# Altium PCB EXP_V121.PcbDoc (part 3 of 4)
Units mm, origin at the board's own origin, x right, y up, seen from the top; angles counter-clockwise.
Board outline 86 x 86 mm, 4 copper layers (Top Layer, Mid-Layer 1, Mid-Layer 2, Bottom Layer), stack 1.584 mm thick; 360 components, 295 nets, 1231 pads, 1192 vias.
Unrouted connection lines stored in the file: 255.
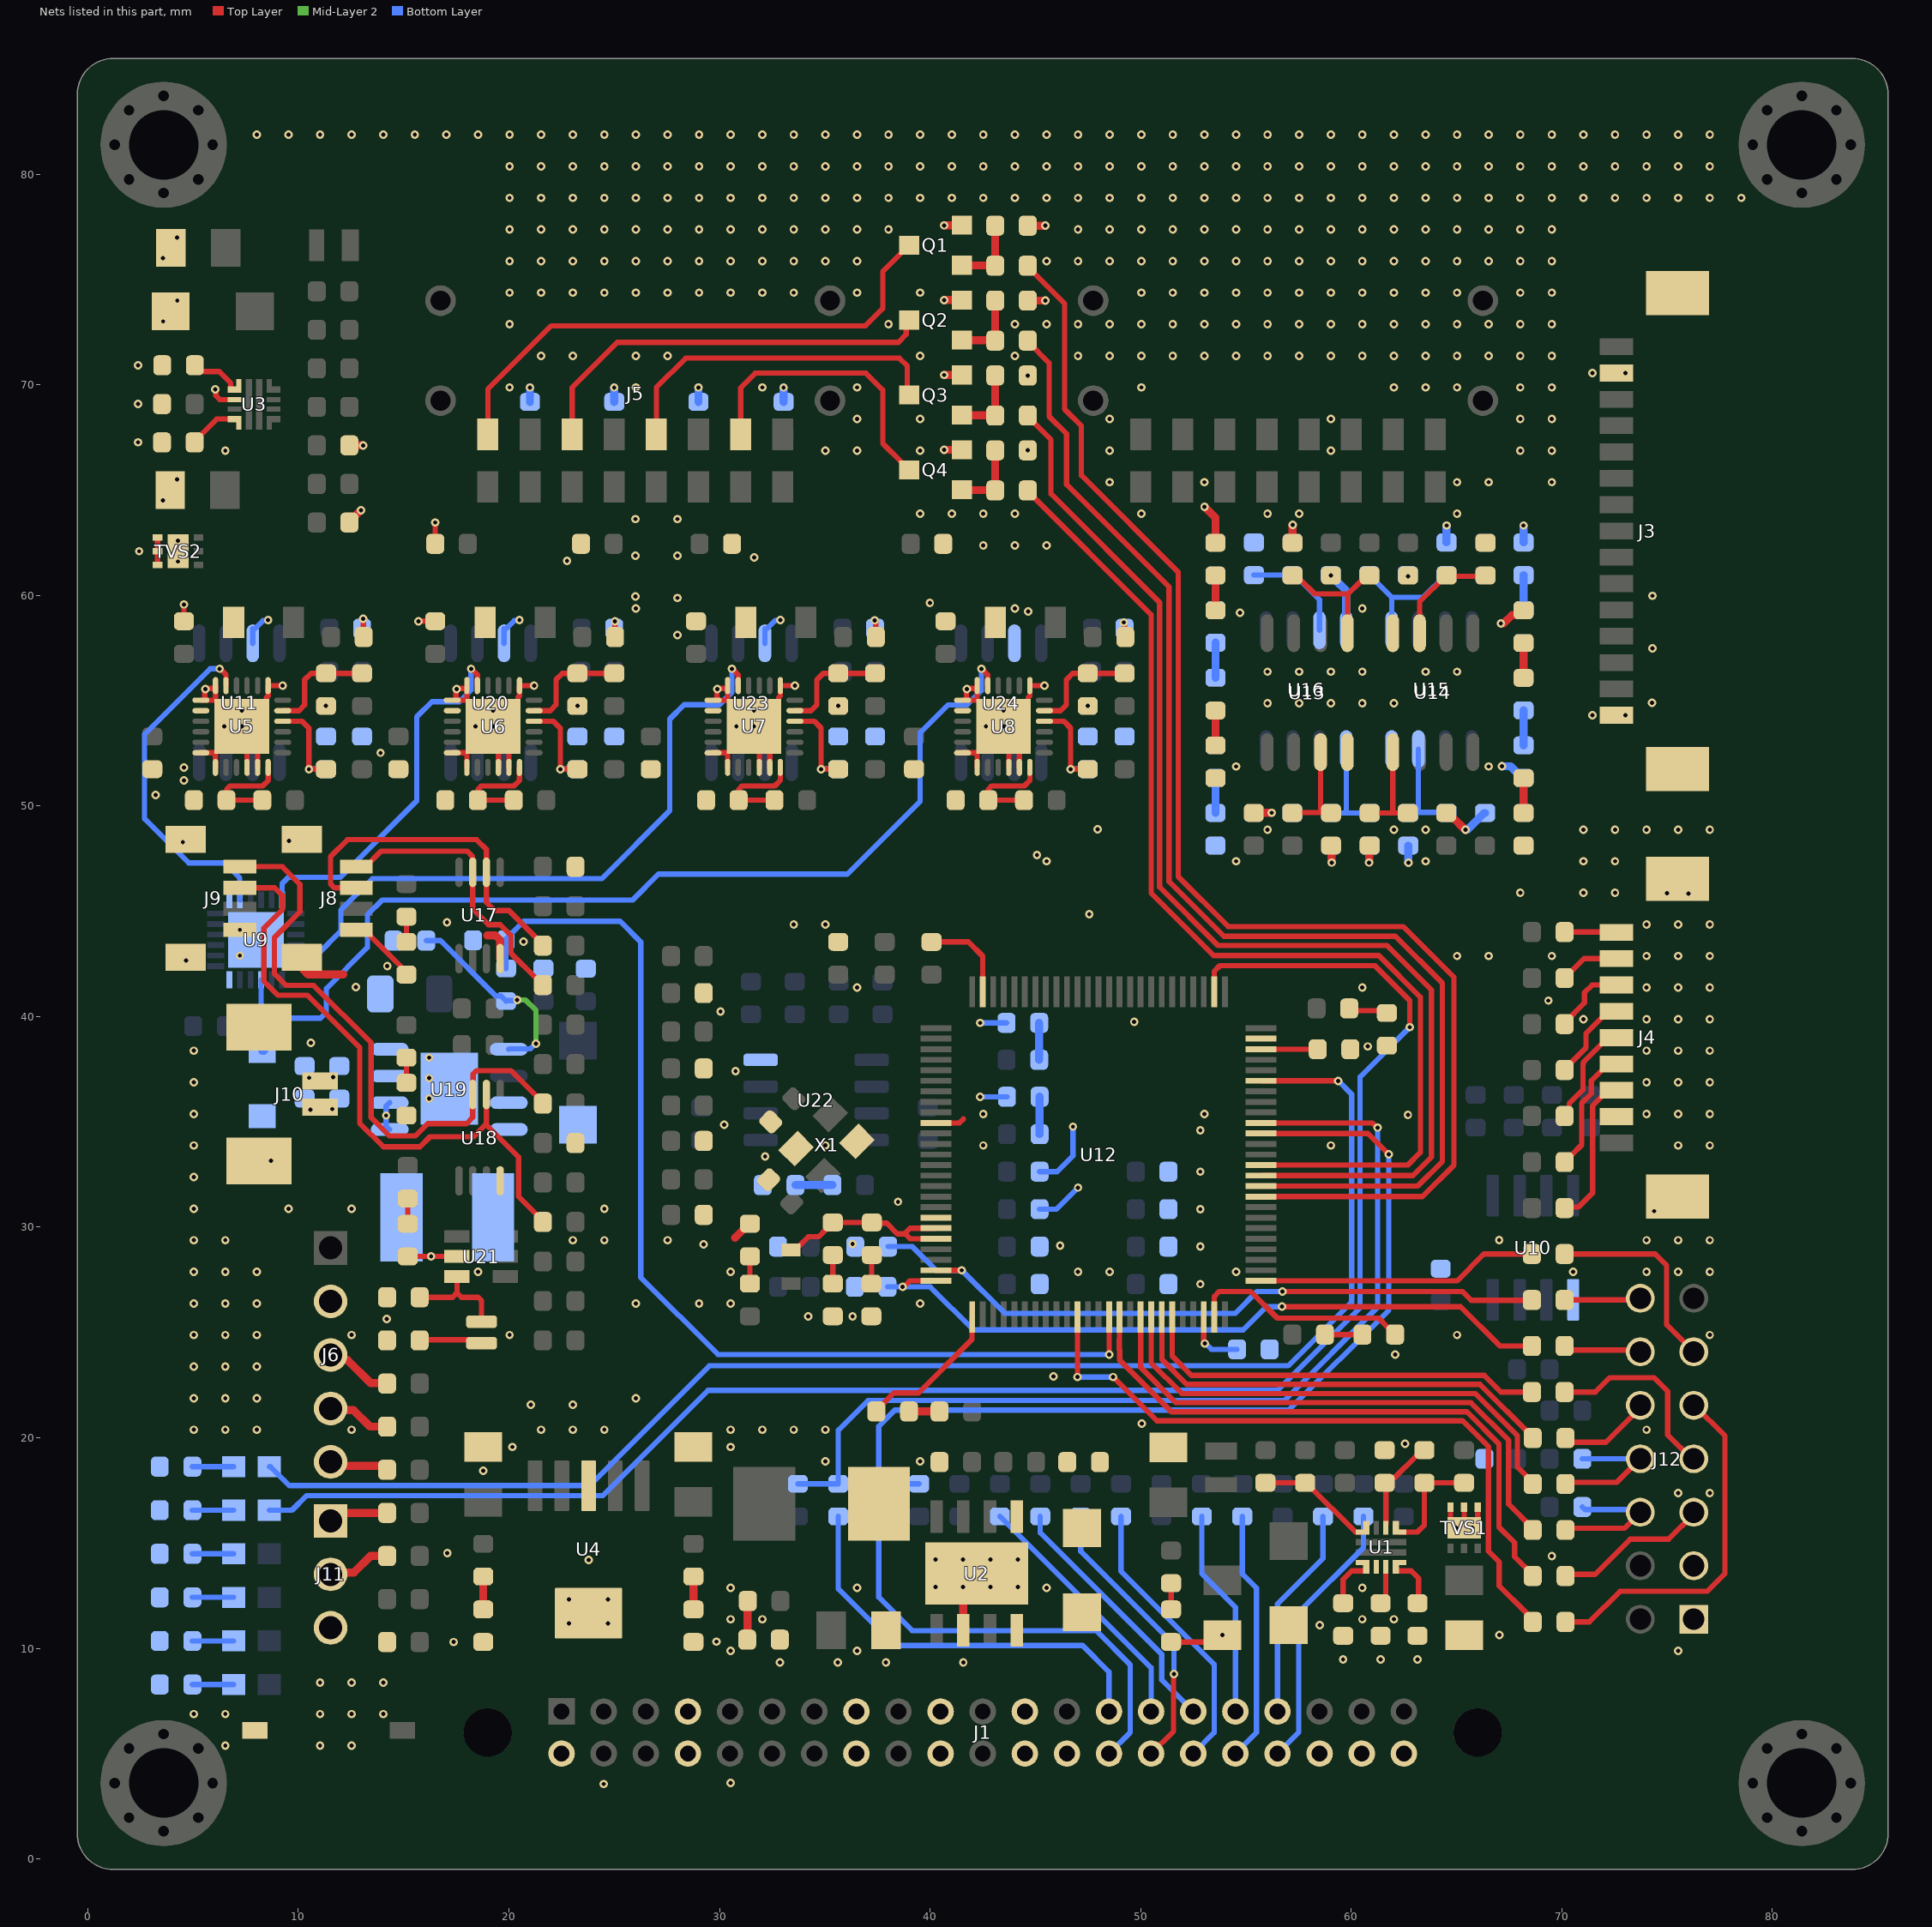
[diagram p5: the nets of this part, all layers, seen from the top]

## Via types
v1: diameter 0.4, hole 0.2, Top Layer to Bottom Layer, tented both sides, 1192 vias

## Nets (pads, with @x,y where several pads share a name; then routed paths per layer and width w, separated by ;. In a path a pad name is that pad's centre, name@x,y a point inside that pad or via, vN(x,y) a via of type N, cw(c..) or ccw(c..) an arc to the next point about the centre after c; other vN are vias at no path point) (continued)
GND: BT1.1 C1.2 C2.2 C3.1 C4.1 C8.2 C9.2 C10.1 C11.1 C12.2 C13.2 C14.1 C15.1 C17.2 C18.2 C20.1 C21.1 C22.1 C23.1 C24.1 C25.1 C26.1 C27.1 C28.1 C29.1 C30.1 C31.1 C32.1 C33.1 C34.1 C35.1 C36.1 C37.1 C38.1 C39.1 C40.1 C41.1 C42.1 C43.1 C44.1 C45.1 C46.1 C47.1 C48.1 C49.1 C50.1 C51.1 C78.1 C79.1 C80.1 C81.1 C82.1 C83.1 C84.1 C87.1 C88.1 C89.1 C90.1 C91.1 C92.1 C95.1 C96.1 C97.1 C98.1 C99.1 C100.1 C103.1 C104.1 C105.1 C106.1 C107.1 C108.1 C111.1 C112.1 C113.1 C114.1 C115.1 C116.1 C119.1 C120.1 C121.1 C122.1 C125.1 C128.1 C129.1 C130.1 C139.1 C144.1 C145.1 C146.1 C148.1 C149.1 C150.2 C151.1 C152.1 C153.1 C154.1 C156.1 D1.2 D2.2 D3.2 J1.34 J1.40 J1.41 J1.42 J3.S1 J3.S2 J4.2 J4.S1 J4.S2 J6.2 J8.1 J8.5 J8.6 J9.1 J9.5 J9.6 J10.S1 J10.S2 J11.3 J12.01 J12.03 Q1.3 Q2.3 Q3.3 Q4.3 R5.2 R6.2 R7.2 R10.2 R11.2 R16.2 R17.2 R18.2 R19.2 R20.2 R27.2 R28.2 R29.2 R30.2 R35.2 R36.2 R46.2 R62.1 R63.1 R64.1 R65.1 R70.2 R71.2 R76.2 R77.2 R82.2 R83.2 R88.2 R89.2 R98.2 R101.2 R104.1 R108.1 R109.1 R111.2 R112.2 R136.2 R137.2 R138.2 R145.2 R151.2 R152.2 R160.2 TVS1.1 TVS1.2 TVS1.3 TVS1.7 TVS2.1 TVS2.2 TVS2.3 TVS2.7 U1.8 U2.6 U2.9 U3.8 U4.3 U4.6 U5.7 U5.12 U5.13 U5.18 U5.19 U5.22 U5.23 U5.25 U6.7 U6.12 U6.13 U6.18 U6.19 U6.22 U6.23 U6.25 U7.7 U7.12 U7.13 U7.18 U7.19 U7.22 U7.23 U7.25 U8.7 U8.12 U8.13 U8.18 U8.19 U8.22 U8.23 U8.25 U9.1 U9.18 U9.HTAB U10.5 U11.7 U12.10 U12.19 U12.26 U12.49 U12.74 U12.99 U13.4 U14.4 U15.4 U16.4 U17.4 U18.4 U19.1 U19.2 U19.EPAD U20.7 U21.2 U22.4 U23.7 U24.7 X1.2 X1.4 | length 150.5
  Top Layer w0.254: TVS2.3@3.313,61.45 TVS2.2@3.313,62.1 TVS2.1@3.313,62.75 ; C24.1@4.562,58.775 v1(4.562,59.572) ; U5.18@5.369,52.525 U5.25@6.062,52.525 ; U5.13@5.369,55.025 U5.13@5.55,55.025 ; v1(6.05,69.78) 6.078,69.752 6.078,69.487 6.264,69.301 U3.8@6.772,69.301 ; U5.19@6.062,51.832 U5.25@6.062,52.525 ; U5.12@6.062,55.718 U5.12@6.062,55.578 ; U5.22@7.562,51.832 7.562,53.102 7.774,53.314 v1(7.312,53.775) ; U5.25@7.824,53.364 8.062,53.125 U5.23@8.062,51.832 ; v1(9.255,55.718) U5.7@8.562,55.718 8.562,55.222 8.485,55.145 8.485,54.948 v1(7.312,53.775) ; J8.1@12.748,44.118 13.193,44.118 13.396,43.915 13.396,43.85 14.836,42.41 14.836,42.288 15.127,41.996 C119.1@15.131,41.996 ; v1(13.072,58.896) 13.086,58.882 13.086,58.048 C26.1@13.081,58.044 ; C148.1@15.194,28.609 U21.2@17.531,28.609 ; v1(15.703,58.775) C25.1@16.5,58.775 ; C32.1@16.5,62.45 v1(16.5,63.463) ; U6.18@17.307,52.525 U6.25@18,52.525 ; U6.13@17.307,55.025 U6.13@17.487,55.025 ; U6.19@18,51.832 U6.25@18,52.525 ; U6.12@18,55.718 U6.12@18,55.578 ; U6.22@19.5,51.832 19.5,53.102 19.711,53.314 v1(19.25,53.775) ; U6.25@19.761,53.364 20,53.125 U6.23@20,51.832 ; v1(21.193,55.718) U6.7@20.5,55.718 20.5,55.222 20.423,55.145 20.423,54.948 v1(19.25,53.775) ; C27.1@25.037,58.025 v1(25.037,58.775) ; U7.18@29.694,52.525 U7.25@30.387,52.525 ; U7.13@29.694,55.025 U7.13@29.874,55.025 ; U7.19@30.387,51.832 U7.25@30.387,52.525 ; U7.12@30.387,55.718 U7.12@30.387,55.578 ; U7.22@31.887,51.832 31.887,53.102 32.098,53.314 v1(31.637,53.775) ; U7.25@32.148,53.364 32.387,53.125 U7.23@32.387,51.832 ; v1(33.58,55.718) U7.7@32.887,55.718 32.887,55.222 32.81,55.145 32.81,54.948 v1(31.637,53.775) ; v1(37.368,58.818) 37.375,58.818 37.419,58.774 37.419,58.03 C38.1@37.424,58.025 ; C146.1@37.449,21.25 37.449,21.3 38.273,22.124 39.448,22.124 41.987,24.663 41.987,25.716 U12.26@42,25.728 ; C128.1@40.07,43.545 41.822,43.545 42.5,42.867 U12.99@42.5,41.172 ; U12.10@40.278,34.95 41.396,34.95 41.587,35.141 ; U8.18@41.544,52.525 U8.25@42.238,52.525 ; U8.13@41.544,55.025 U8.13@41.725,55.025 ; U8.19@42.238,51.832 U8.25@42.238,52.525 ; U8.12@42.238,55.718 U8.12@42.238,55.578 ; U8.22@43.738,51.832 43.738,53.102 43.949,53.314 v1(43.488,53.775) ; U8.25@43.999,53.364 44.238,53.125 U8.23@44.238,51.832 ; v1(45.431,55.718) U8.7@44.738,55.718 44.738,55.222 44.661,55.145 44.661,54.948 v1(43.488,53.775) ; v1(49.2,58.718) 49.228,58.691 49.228,58.072 C39.1@49.275,58.025 ; C10.1@51.445,10.299 53.554,10.299 v1(53.881,10.626) ; U12.49@53.5,25.728 53.5,26.71 53.735,26.945 55.224,26.945 56.489,25.68 61.301,25.68 61.736,25.245 61.74,25.245 62.267,24.718 C144.1@62.267,24.714 ; TVS1.3@64.714,16.699 64.714,16.097 TVS1.7@65.087,15.724 ; TVS1.7@65.364,15.724 TVS1.2@65.364,16.699 ; v1(65.761,15.723) 66.014,15.976 TVS1.1@66.014,16.699 ; U5.13@5.55,55.025 U5.25@6.062,55.025 ; U5.13@5.55,55.025 5.55,55.522 v1(5.578,55.55) 5.606,55.578 U5.12@6.062,55.578 ; U5.25@6.062,52.525 v1(7.312,53.775) ; U5.25@6.062,55.025 U5.12@6.062,55.578 ; U5.25@6.062,55.025 v1(7.312,53.775) ; U6.13@17.487,55.025 17.487,55.522 v1(17.515,55.55) 17.543,55.578 U6.12@18,55.578 ; U6.13@17.487,55.025 U6.25@18,55.025 ; U6.25@18,52.525 v1(19.25,53.775) ; U6.25@18,55.025 v1(19.25,53.775) ; U6.25@18,55.025 U6.12@18,55.578 ; U7.13@29.874,55.025 29.874,55.522 v1(29.902,55.55) 29.93,55.578 U7.12@30.387,55.578 ; U7.13@29.874,55.025 U7.25@30.387,55.025 ; U7.25@30.387,52.525 v1(31.637,53.775) ; U7.25@30.387,55.025 v1(31.637,53.775) ; U7.25@30.387,55.025 U7.12@30.387,55.578 ; U8.13@41.725,55.025 41.725,55.522 v1(41.753,55.55) 41.781,55.578 U8.12@42.238,55.578 ; U8.13@41.725,55.025 U8.25@42.238,55.025 ; U8.25@42.238,52.525 v1(43.488,53.775) ; U8.25@42.238,55.025 v1(43.488,53.775) ; U8.25@42.238,55.025 U8.12@42.238,55.578
  Top Layer w0.381: J8.5@9.748,42.818 J8.5@10.168,42.818 10.231,42.755 10.231,42.227 10.454,42.004 12.125,42.004 ; R17.2@12.423,63.463 12.423,63.501 12.956,64.035 12.968,64.035 v1(12.972,64.038) ; R18.2@12.423,67.124 v1(13.074,67.124) ; 18.973,43.852 19.357,43.852 19.581,43.629 U17.4@19.581,42.752 ; 30.745,29.5 31.407,30.162 C80.1@31.445,30.162 ; v1(40.665,77.572) 40.669,77.575 41.502,77.575 Q1.3@41.508,77.582 ; v1(40.672,66.91) 40.676,66.914 Q4.3@41.508,66.914 Q4.3@41.515,66.92 ; v1(40.672,70.466) 40.676,70.47 Q3.3@41.508,70.47 Q3.3@41.515,70.476 ; v1(40.672,74.022) 40.676,74.026 Q2.3@41.508,74.026 Q2.3@41.515,74.032 ; U2.9@41.562,12.908 41.577,12.893 U2.6@41.577,10.858 ; R63.1@44.636,73.994 R63.1@44.642,74 45.475,74 v1(45.479,74.004) ; R62.1@44.636,77.55 R62.1@44.642,77.556 45.475,77.556 v1(45.479,77.56) ; D2.2@47.216,15.71 47.216,15.202 D2.2@47.247,15.171 ; v1(53.035,64.211) 53.035,64.206 53.554,63.687 C87.1@53.554,62.497 ; R71.2@55.371,49.67 55.374,49.673 56.224,49.673 v1(56.227,49.676) ; C90.1@57.219,62.497 v1(57.219,63.351) ; C89.1@59.041,48.12 59.068,48.093 59.068,47.317 v1(59.072,47.313) ; v1(60.852,47.313) 60.856,47.317 60.856,48.106 C97.1@60.87,48.12 ; v1(62.702,60.91) R76.2@62.702,60.947 ; R77.2@64.516,49.67 64.736,49.449 64.832,49.449 65.408,48.873 v1@65.422,48.873 ; v1(67.109,58.671) 67.113,58.674 67.244,58.674 67.639,59.069 67.965,59.069 C95.1@68.186,59.29 ; C96.1@68.134,48.12 C96.1@68.186,48.12 ; v1(74.394,30.762) 74.47,30.762 75.158,31.45 J4.S1@75.5,31.45 ; J4.S2@75.5,46.55 76.013,46.037 v1(76.013,45.845)
  Bottom Layer w0.254: U11.7@7.832,57.725 7.832,58.419 7.926,58.419 8.316,58.809 8.534,58.809 v1(8.562,58.837) ; U19.1@14.341,34.638 14.325,34.638 14.165,34.797 v1(14.165,35.3) 14.165,35.748 14.325,35.908 U19.2@14.341,35.908 ; U20.7@19.77,57.725 19.77,58.419 19.864,58.419 20.254,58.809 20.472,58.809 v1(20.5,58.837) ; U23.7@32.157,57.725 32.157,58.419 32.251,58.419 32.641,58.809 32.859,58.809 v1(32.887,58.837) ; v1(42.372,36.192) C130.1@43.652,36.192 ; v1(42.372,39.7) C145.1@43.632,39.7 ; C98.1@45.202,30.855 46.006,30.855 v1(47.029,31.878) ; C92.1@45.202,32.634 46.029,32.634 46.785,33.39 v1(46.785,34.771)
  Bottom Layer w0.381: v1(20.997,69.875) 20.999,69.874 C83.1@21,69.191 C83.1@21,69.191 ; v1(24.997,69.875) v1(24.997,69.875) 24.999,69.192 C84.1@25,69.191 ; v1(28.997,69.875) v1(28.997,69.875) 28.999,69.192 C139.1@29,69.191 ; v1(33.043,69.875) 33.044,69.874 C122.1@33.045,69.191 C122.1@33.045,69.191 ; v1(59.038,60.947) 59.086,60.947 59.3,60.734 59.3,60.685 59.764,60.221 U16.4@59.764,58.353 ; v1(62.715,47.305) C107.1@62.715,48.12 ; C105.1@64.528,62.517 v1(64.528,63.32) ; v1(65.43,48.87) 65.434,48.873 65.52,48.873 66.316,49.67 R83.2@66.366,49.67 ; v1(67.158,51.892) 67.161,51.889 67.567,51.889 68.124,51.332 C104.1@68.186,51.332 ; C103.1@68.186,62.517 v1(68.186,63.32)
  other v1: 6.529,5.378 11.029,5.378 12.529,5.378 5.029,6.878 6.529,6.878 11.029,6.878 12.529,6.878 14.029,6.878 11.029,8.378 12.529,8.378 14.029,8.378 32.864,9.326 35.62,9.326 37.906,9.326 41.577,9.326 59.617,9.474 61.395,9.474 63.149,9.474 30.529,9.878 36.529,9.878 75.529,9.878 17.376,10.299 29.854,10.318 67.032,10.626 58.5,11.096 22.858,11.176 24.707,11.176 30.529,11.378 32.029,11.378 60.529,11.378 62.029,11.378 22.858,12.319 24.707,12.319 30.529,12.878 36.529,12.878 45.529,12.878 60.529,12.878 23.783,14.193 69.529,14.378 17.075,14.521 64.973,15.723 75.529,17.378 77.029,17.378 18.779,18.428 35.029,18.878 39.529,18.878 20.159,19.56 30.529,19.56 62.56,19.714 5.029,20.378 6.529,20.378 8.029,20.378 12.529,20.378 21.529,20.378 23.029,20.378 24.529,20.378 30.529,20.378 32.029,20.378 33.529,20.378 35.029,20.378 74.029,20.378 50.051,20.672 21.036,21.565 23.036,21.565 5.029,21.878 6.529,21.878 8.029,21.878 26.029,21.878 45.854,22.908 5.029,23.378 6.529,23.378 8.029,23.378 62.084,23.952 5.029,24.878 6.529,24.878 8.029,24.878 12.529,24.878 20.029,24.878 65.029,24.878 77.029,24.878 14.202,25.645 34.219,25.767 36.322,25.767 5.029,26.378 6.529,26.378 8.029,26.378 26.029,26.378 29.029,26.378 30.529,26.378 39.529,26.378 52.835,27.297 5.029,27.878 6.529,27.878 8.029,27.878 18.529,27.878 30.529,27.878 47.029,27.878 48.529,27.878 54.529,27.878 70.54,27.878 74.029,27.878 75.529,27.878 77.029,27.878 16.305,28.609 52.835,29.08 46.177,29.126 29.25,29.187 36.322,29.205 5.029,29.378 6.529,29.378 23.029,29.378 24.529,29.378 27.529,29.378 67.029,29.385 74.029,29.378 75.529,29.378 77.029,29.378 52.835,30.855 5.029,30.878 9.529,30.878 12.529,30.878 24.529,30.878 38.478,31.207 5.029,32.378 52.835,32.634 8.691,33.147 32.167,33.362 5.029,33.878 35.029,33.878 42.529,33.878 59.029,33.878 75.529,33.878 77.029,33.878 52.835,34.598 30.226,34.858 62.693,35.329 5.029,35.378 42.529,35.378 53.029,35.378 74.029,35.378 75.529,35.378 77.029,35.378 16.205,36.101 5.029,36.878 74.029,36.878 75.529,36.878 77.029,36.878 16.205,37.075 30.759,37.414 16.205,38.049 5.029,38.378 74.029,38.378 75.529,38.378 77.029,38.378 60.782,38.583 10.588,38.756 49.695,39.744 71.029,39.878 74.029,39.878 75.529,39.878 77.029,39.878 30.048,40.234 69.366,40.759 12.724,41.395 36.529,41.378 60.529,41.378 74.029,41.378 75.529,41.378 77.029,41.378 14.224,42.395 4.664,42.662 7.221,42.895 65.029,42.878 66.529,42.878 69.529,42.878 74.029,42.878 75.529,42.878 77.029,42.878 20.691,43.553 7.221,44.118 33.529,44.378 35.029,44.378 74.029,44.378 75.529,44.378 77.029,44.378 17.056,44.475 47.561,44.858 74.992,45.866 68.029,45.878 71.029,45.878 72.529,45.878 45.529,47.378 54.529,47.378 63.529,47.378 71.029,47.378 72.529,47.378 45.075,47.668 4.514,48.291 9.55,48.336 56.029,48.878 62.029,48.878 63.529,48.878 71.029,48.878 72.529,48.878 74.029,48.878 75.529,48.878 77.029,48.878 47.957,48.9 3.226,50.521 4.562,51.212 4.562,51.832 54.529,51.878 66.529,51.878 13.9,52.525 6.477,53.775 18.415,53.775 30.801,53.775 42.652,53.775 7.312,54.534 19.25,54.534 31.637,54.534 43.488,54.534 11.312,54.75 23.25,54.75 35.637,54.75 47.488,54.75 56.029,54.878 57.529,54.878 59.029,54.878 60.529,54.878 62.029,54.878 56.029,56.378 57.529,56.378 59.029,56.378 60.529,56.378 63.529,56.378 65.029,56.378 28.001,58.114 54.712,59.182 44.661,59.235 26.029,59.378 44.029,59.378 60.529,59.378 39.989,59.644 28.001,59.878 26.001,59.95 4.283,61.608 22.758,61.646 31.648,61.798 26.001,61.882 28.001,61.882 2.438,62.1 42.529,62.378 44.029,62.378 45.529,62.378 4.283,62.599 26.001,63.625 28.001,63.625 39.529,63.878 41.029,63.878 42.529,63.878 44.029,63.878 50.029,63.878 56.029,63.878 57.529,63.878 65.029,63.878 3.559,64.512 48.529,65.378 53.029,65.378 65.029,65.378 66.529,65.378 69.529,65.378 4.231,65.503 6.529,66.878 35.029,66.878 36.529,66.878 39.529,66.878 44.642,66.888 48.529,66.878 59.029,66.878 68.029,66.878 69.529,66.878 2.388,67.269 36.529,68.378 39.529,68.378 48.529,68.378 59.029,68.378 68.029,68.378 69.529,68.378 2.388,69.087 20.029,69.878 26.029,69.878 32.029,69.878 36.529,69.878 50.029,69.878 62.029,69.878 63.529,69.878 65.029,69.878 68.029,69.878 69.529,69.878 44.642,70.444 2.388,70.93 21.529,71.378 23.029,71.378 26.029,71.378 27.529,71.378 39.529,71.378 44.029,71.378 47.029,71.378 48.529,71.378 50.029,71.378 51.529,71.378 53.029,71.378 54.529,71.378 56.029,71.378 57.529,71.378 59.029,71.378 60.529,71.378 62.029,71.378 63.529,71.378 65.029,71.378 66.529,71.378 68.029,71.378 69.529,71.378 20.029,72.878 38.029,72.878 44.029,72.878 45.529,72.878 47.029,72.878 48.529,72.878 50.029,72.878 51.529,72.878 53.029,72.878 54.529,72.878 56.029,72.878 57.529,72.878 59.029,72.878 60.529,72.878 62.029,72.878 63.529,72.878 65.029,72.878 66.529,72.878 68.029,72.878 69.529,72.878 3.579,73.013 4.251,74.003 20.029,74.378 21.529,74.378 23.029,74.378 24.529,74.378 26.029,74.378 27.529,74.378 29.029,74.378 30.529,74.378 32.029,74.378 33.529,74.378 36.529,74.378 39.529,74.378 50.029,74.378 51.529,74.378 53.029,74.378 54.529,74.378 56.029,74.378 57.529,74.378 59.029,74.378 60.529,74.378 62.029,74.378 63.529,74.378 65.029,74.378 68.029,74.378 69.529,74.378 20.029,75.878 21.529,75.878 23.029,75.878 24.529,75.878 26.029,75.878 27.529,75.878 29.029,75.878 30.529,75.878 32.029,75.878 33.529,75.878 35.029,75.878 36.529,75.878 45.529,75.878 47.029,75.878 48.529,75.878 50.029,75.878 51.529,75.878 53.029,75.878 54.529,75.878 56.029,75.878 57.529,75.878 59.029,75.878 60.529,75.878 62.029,75.878 63.529,75.878 65.029,75.878 66.529,75.878 68.029,75.878 69.529,75.878 3.572,76.01 4.244,77.001 20.029,77.378 21.529,77.378 23.029,77.378 24.529,77.378 26.029,77.378 27.529,77.378 29.029,77.378 30.529,77.378 32.029,77.378 33.529,77.378 35.029,77.378 36.529,77.378 38.029,77.378 47.029,77.378 48.529,77.378 50.029,77.378 51.529,77.378 53.029,77.378 54.529,77.378 56.029,77.378 57.529,77.378 59.029,77.378 60.529,77.378 62.029,77.378 63.529,77.378 65.029,77.378 66.529,77.378 68.029,77.378 69.529,77.378 20.029,78.878 21.529,78.878 23.029,78.878 24.529,78.878 26.029,78.878 27.529,78.878 29.029,78.878 30.529,78.878 32.029,78.878 33.529,78.878 35.029,78.878 36.529,78.878 38.029,78.878 39.529,78.878 41.029,78.878 42.529,78.878 44.029,78.878 45.529,78.878 47.029,78.878 48.529,78.878 50.029,78.878 51.529,78.878 53.029,78.878 54.529,78.878 56.029,78.878 57.529,78.878 59.029,78.878 60.529,78.878 62.029,78.878 63.529,78.878 65.029,78.878 66.529,78.878 68.029,78.878 69.529,78.878 71.029,78.878 72.529,78.878 74.029,78.878 75.529,78.878 77.029,78.878 78.529,78.878 20.029,80.378 21.529,80.378 23.029,80.378 24.529,80.378 26.029,80.378 27.529,80.378 29.029,80.378 30.529,80.378 32.029,80.378 33.529,80.378 35.029,80.378 36.529,80.378 38.029,80.378 39.529,80.378 41.029,80.378 42.529,80.378 44.029,80.378 45.529,80.378 47.029,80.378 48.529,80.378 50.029,80.378 51.529,80.378 53.029,80.378 54.529,80.378 56.029,80.378 57.529,80.378 59.029,80.378 60.529,80.378 62.029,80.378 63.529,80.378 65.029,80.378 66.529,80.378 68.029,80.378 69.529,80.378 71.029,80.378 72.529,80.378 74.029,80.378 75.529,80.378 77.029,80.378 8.029,81.878 9.529,81.878 11.029,81.878 12.529,81.878 14.029,81.878 15.529,81.878 17.029,81.878 18.529,81.878 20.029,81.878 21.529,81.878 23.029,81.878 24.529,81.878 26.029,81.878 27.529,81.878 29.029,81.878 30.529,81.878 32.029,81.878 33.529,81.878 35.029,81.878 36.529,81.878 38.029,81.878 39.529,81.878 41.029,81.878 42.529,81.878 44.029,81.878 45.529,81.878 47.029,81.878 48.529,81.878 50.029,81.878 51.529,81.878 53.029,81.878 54.529,81.878 56.029,81.878 57.529,81.878 59.029,81.878 60.529,81.878 62.029,81.878 63.529,81.878 65.029,81.878 66.529,81.878 68.029,81.878 69.529,81.878 71.029,81.878 72.529,81.878 74.029,81.878 75.529,81.878 77.029,81.878
GND_CAM: J1.4 J1.8 J1.10 J1.12 J1.22 J1.25 J1.29 J1.31 J1.33 J3.1 J3.14
  other v1: 24.5,3.556 30.522,3.603 71.457,54.309 73.025,54.311 74.282,54.896 74.303,57.482 74.303,59.982 71.457,70.559 73.025,70.561
HEATER_1_B: J5.9 Q1.2 | length 26
  Top Layer w0.254: J5.9@19,67.65 19,69.789 22.012,72.801 36.936,72.801 37.753,73.617 37.753,75.376 38.66,76.284 38.66,76.309 38.983,76.632 Q1.2@39.008,76.632
HEATER_2_B: J5.11 Q2.2 | length 19.9
  Top Layer w0.254: J5.11@23,67.65 23,69.872 25.145,72.017 38.49,72.017 38.866,72.394 38.866,72.934 Q2.2@39.008,73.076
HEATER_3_B: J5.13 Q3.2 | length 16.3
  Top Layer w0.254: J5.13@27,67.65 27,69.871 28.399,71.27 38.546,71.27 38.919,70.897 38.919,69.609 Q3.2@39.008,69.52
HEATER_4_B: J5.15 Q4.2 | length 13.9
  Top Layer w0.254: J5.15@31,67.65 31.002,67.652 31.002,69.861 31.697,70.556 36.947,70.556 37.753,69.751 37.753,67.219 38.66,66.312 38.66,66.287 38.983,65.964 Q4.2@39.008,65.964
HEATER_PWM4_1: R58.1 U12.59 | length 65.7
  Top Layer w0.254: R58.1@44.642,75.656 44.642,75.606 46.387,73.862 46.387,68.849 47.188,68.048 47.188,65.697 51.787,61.099 51.787,46.638 54.15,44.275 62.461,44.275 64.881,41.856 64.881,32.949 63.382,31.45 U12.59@55.722,31.45
HEATER_PWM4_2: R59.1 U12.60 | length 61
  Top Layer w0.254: R59.1@44.642,72.1 44.642,72.05 45.655,71.038 45.655,68.503 46.482,67.676 46.482,65.269 51.351,60.401 51.351,46.414 53.95,43.815 62.099,43.815 64.33,41.584 64.33,33.131 63.149,31.95 U12.60@55.722,31.95
HEATER_PWM4_3: R60.1 U12.61 | length 56.3
  Top Layer w0.254: R60.1@44.642,68.544 44.642,68.494 45.743,67.394 45.743,64.825 50.904,59.665 50.904,46.15 53.679,43.374 61.706,43.374 63.813,41.267 63.813,33.333 62.93,32.45 U12.61@55.722,32.45
HEATER_PWM4_4: R61.1 U12.62 | length 51.6
  Top Layer w0.254: R61.1@44.642,64.988 44.642,64.938 50.5,59.081 50.5,45.868 53.467,42.901 61.315,42.901 63.286,40.93 63.286,33.543 62.693,32.95 U12.62@55.722,32.95
ILIM_1: R23.2 R27.1 U5.4 | length 5
  Top Layer w0.254: U5.4@9.255,54.025 10.175,54.025 10.5,53.7 v1(10.5,51.75) R23.2@11.312,51.75
  Bottom Layer w0.254: v1(10.5,51.75) R27.1@11.312,51.75
ILIM_2: R24.2 R28.1 U6.4 | length 5
  Top Layer w0.254: U6.4@21.193,54.025 22.113,54.025 22.438,53.7 v1(22.438,51.75) R24.2@23.25,51.75
  Bottom Layer w0.254: v1(22.438,51.75) R28.1@23.25,51.75
ILIM_3: R56.2 R136.1 U7.4 | length 5
  Top Layer w0.254: U7.4@33.58,54.025 34.5,54.025 34.825,53.7 v1(34.825,51.75) R56.2@35.637,51.75
  Bottom Layer w0.254: v1(34.825,51.75) R136.1@35.637,51.75
ILIM_4: R57.2 R137.1 U8.4 | length 5
  Top Layer w0.254: U8.4@45.431,54.025 46.35,54.025 46.675,53.7 v1(46.675,51.75) R57.2@47.488,51.75
  Bottom Layer w0.254: v1(46.675,51.75) R137.1@47.488,51.75
IR_LED_P: C123.2 C124.2 D5.2 J10.1 R102.1 U19.3 U19.4 | length 1.4
  Top Layer w0.381: v1(10.513,37.092) 10.888,37.092 J10.1@11.033,36.947 ; J10.1@10.888,37.141 11.629,37.141 v1(11.65,37.12)
  Bottom Layer w0.381: D5.2@8.282,38.372 D5.2@8.357,38.372
IR_LED_PWM: R103.2 R104.2 U12.39 | length 50
  Top Layer w0.254: U12.39@48.5,25.728 48.502,25.726 48.502,23.955 v1(48.505,23.952)
  Bottom Layer w0.254: R103.2@19.861,42.286 19.855,42.293 19.855,43.615 R104.2@19.848,43.621 19.848,43.671 20.703,44.526 25.275,44.526 26.264,43.538 26.264,27.61 29.921,23.952 v1(48.505,23.952)
IRQ_0: R44.2 R55.2 U12.65 | length 45
  Top Layer w0.254: U12.65@55.722,34.45 60.79,34.45 v1(61.785,33.455)
  Bottom Layer w0.254: R44.2@39.478,17.812 R55.2@37.56,17.812 37.56,20.545 38.325,21.311 57.033,21.311 61.785,26.062 v1(61.785,33.455)
IRQ_1: R41.2 R54.1 U12.66 | length 46.7
  Top Layer w0.254: U12.66@55.722,34.95 60.994,34.95 61.215,34.729 v1(61.255,34.729)
  Bottom Layer w0.254: R41.2@33.723,17.812 R54.1@35.641,17.812 35.641,20.363 37.046,21.768 56.82,21.768 61.255,26.203 v1(61.255,34.729)
ITEC_ADC_1: U5.11 U9.2 | length 16.5
  Top Layer w0.254: v1(6.263,56.517) 6.283,56.517 6.562,56.238 U5.11@6.562,55.718
  Bottom Layer w0.254: v1(6.263,56.517) 5.809,56.517 2.692,53.4 2.692,49.395 4.79,47.298 6.495,47.298 7.217,46.577 7.217,45.558 U9.2@7.227,45.547
ITEC_ADC_2: U6.11 U9.6 | length 17.8
  Top Layer w0.254: v1(18.2,56.517) 18.221,56.517 18.5,56.238 U6.11@18.5,55.718
  Bottom Layer w0.254: U9.6@9.227,45.547 9.227,46.311 9.55,46.634 ; 9.55,46.609 11.989,46.609 15.623,50.243 15.623,54.231 16.34,54.948 17.646,54.948 18.2,55.502 v1(18.2,56.517)
ITEC_ADC_3: U7.11 U9.11 | length 31.1
  Top Layer w0.254: v1(30.587,56.517) 30.608,56.517 30.887,56.238 U7.11@30.887,55.718
  Bottom Layer w0.254: U9.11@9.879,42.895 10.857,42.895 12.014,44.052 12.014,45.06 13.505,46.551 24.415,46.551 27.635,49.771 27.635,54.127 28.321,54.813 29.997,54.813 30.587,55.403 v1(30.587,56.517)
ITEC_ADC_4: U8.11 U9.15 | length 47.5
  Top Layer w0.254: v1(42.438,56.517) 42.459,56.517 42.738,56.238 U8.11@42.738,55.718
  Bottom Layer w0.254: U9.15@8.227,41.743 8.227,40.564 8.865,39.927 11.047,39.927 11.328,40.208 11.328,41.334 13.278,43.283 13.278,44.824 13.988,45.535 25.876,45.535 27.103,46.761 36.068,46.761 39.522,50.216 39.522,53.467 40.855,54.8 41.756,54.8 42.438,55.482 v1(42.438,56.517)
LASER_ADC1: C152.2 R126.2 U12.25 | length 34.4
  Top Layer w0.254: v1(38.7,27.165) 38.74,27.165 39.024,27.45 U12.25@40.278,27.45 ; v1(56.711,26.224) 65.196,26.224 67.064,24.356 R126.2@68.585,24.356
  Bottom Layer w0.254: C152.2@37.975,27.165 v1(38.7,27.165) 40.009,27.165 42.054,25.121 54.869,25.121 55.972,26.224 v1(56.711,26.224)
LASER_ADC2: C153.2 R127.2 U12.24 | length 33.7
  Top Layer w0.254: U12.24@40.278,27.95 v1(41.504,27.95) ; v1(56.738,26.945) 65.279,26.945 65.698,26.526 R127.2@68.571,26.526
  Bottom Layer w0.254: C153.2@38,29.076 39.162,29.076 40.288,27.95 v1(41.504,27.95) 43.546,25.908 54.496,25.908 55.533,26.945 v1(56.738,26.945)
LASER_DAC_CS: R123.1 U12.36 | length 32.9
  Top Layer w0.254: v1(46.995,22.883) 46.998,22.885 46.998,25.726 U12.36@47,25.728 ; v1(48.692,22.883) 50.773,20.803 65.288,20.803 66.514,19.577 66.514,14.616 67.032,14.098 67.032,12.966 68.327,11.671 68.327,11.644 68.625,11.346 R123.1@68.625,11.25
  Bottom Layer w0.254: v1(46.995,22.883) v1(48.692,22.883)
LASER_DAC_LATCH: R125.1 U12.51 | length 13.4
  Top Layer w0.254: U12.51@55.722,27.45 65.026,27.45 66.3,28.724 R125.1@68.585,28.724
LASER_SPI4_MISO: R122.2 U12.43 | length 23.6
  Top Layer w0.254: U12.43@50.5,25.728 50.5,23.552 51.954,22.098 65.888,22.098 67.895,20.091 67.895,18.597 68.625,17.867 R122.2@68.625,17.803
LASER_SPI4_MOSI: R124.2 U12.44 | length 21.2
  Top Layer w0.254: U12.44@51,25.728 51.013,25.716 51.013,23.709 52.192,22.53 66.117,22.53 68.625,20.022 R124.2@68.625,19.987
LASER_SPI4_SCK: R120.2 U12.42 | length 26
  Top Layer w0.254: U12.42@50,25.728 50,24.381 50.005,24.376 50.005,23.958 50,23.953 50,23.339 51.673,21.666 65.688,21.666 67.475,19.879 67.475,16.847 R120.2@68.625,15.697
LASER_SW_EXT_CS: R121.1 U12.45 | length 19.6
  Top Layer w0.254: U12.45@51.5,25.728 51.5,23.874 52.413,22.962 66.323,22.962 67.113,22.171 R121.1@68.585,22.171
LASER_SW_INT_CS: R8.1 U12.40 | length 28.7
  Top Layer w0.254: U12.40@49,25.728 49,24.682 48.987,24.669 48.987,24.188 49.01,24.166 49.01,23.685 51.46,21.234 65.495,21.234 67.016,19.714 67.016,15.763 67.759,15.019 67.759,14.35 68.625,13.484 R8.1@68.625,13.434
LED_B: DS6.1 U12.77 | length 82.4
  Top Layer w0.254: U12.77@53.5,41.172 53.5,42.156 53.762,42.418 61.122,42.418 62.781,40.759 v1(62.781,39.495)
  Bottom Layer w0.254: DS6.1@8.623,16.557 9.695,16.557 10.384,17.247 24.447,17.247 29.45,22.25 56.504,22.25 60.424,26.17 60.424,37.138 v1(62.781,39.495)
LED_G: DS5.1 U12.70 | length 69.8
  Top Layer w0.254: U12.70@55.722,36.95 59.38,36.95 v1(59.385,36.945)
  Bottom Layer w0.254: DS5.1@8.623,18.627 8.673,18.627 9.319,17.981 ; 9.331,17.981 9.319,17.981 ; v1(59.385,36.945) 60.02,36.31 60.02,26.437 57,23.417 29.517,23.417 23.829,17.729 9.571,17.729 9.319,17.981
NetC3_2: C3.2 U1.7 | length 2.6
  Top Layer w0.254: C3.2@59.617,12.145 59.617,13.265 60.026,13.674 60.697,13.674 60.72,13.697 U1.7@60.72,13.872
NetC4_2: C4.2 U1.10 | length 2.6
  Top Layer w0.254: U1.10@62.12,13.872 62.12,13.697 62.143,13.674 62.845,13.674 63.195,13.323 63.195,12.192 C4.2@63.149,12.145
NetC5_1: C5.1 D2.1 L1.1 U2.8
NetC5_2: C5.2 U2.1
NetC6_1: C6.1 C10.2 | length 1.2
  Top Layer w0.254: C10.2@51.445,11.849 C6.1@51.445,13.09
NetC7_1: C7.1 C11.2 | length 1.9
  Top Layer w0.381: C11.2@31.314,10.412 31.33,10.428 31.33,12.234 C7.1@31.346,12.25
NetC14_2: C14.2 U3.7 | length 2.5
  Top Layer w0.254: C14.2@5.084,70.93 5.084,70.927 5.375,70.635 6.239,70.635 6.781,70.093 6.781,69.799 6.804,69.776 U3.7@6.97,69.776
NetC15_2: C15.2 U3.10 | length 2.4
  Top Layer w0.254: C15.2@5.07,67.269 5.07,67.319 6.127,68.376 U3.10@6.97,68.376
NetC16_1: C16.1 C20.2 | length 1.6
  Top Layer w0.381: C20.2@28.761,11.849 C16.1@28.761,13.411
NetC19_1: C19.1 C21.2 | length 1.6
  Top Layer w0.381: C21.2@18.779,11.849 C19.1@18.779,13.411
NetC22_2: C22.2 R21.2 U5.5 | length 5.2
  Top Layer w0.254: U5.5@9.255,54.525 10.025,54.525 10.3,54.8 10.3,56 10.6,56.3 C22.2@11.312,56.3 R21.2@13.025,56.3
NetC23_2: C23.2 R22.2 U6.5 | length 5.2
  Top Layer w0.254: U6.5@21.193,54.525 21.963,54.525 22.238,54.8 22.238,56 22.538,56.3 C23.2@23.25,56.3 R22.2@24.963,56.3
NetC30_2: C30.2 R33.2 U5.24 | length 5
  Top Layer w0.254: R33.2@8.287,50.275 C30.2@6.587,50.275 6.575,50.287 6.6,50.312 6.6,50.801 6.749,50.95 8.3,50.95 8.562,51.212 U5.24@8.562,51.832
NetC31_2: C31.2 R34.2 U6.24 | length 5
  Top Layer w0.254: R34.2@20.225,50.275 C31.2@18.525,50.275 18.513,50.287 18.538,50.312 18.538,50.801 18.687,50.95 20.238,50.95 20.5,51.212 U6.24@20.5,51.832
NetC34_2: C34.2 R37.2 U7.5 | length 5.2
  Top Layer w0.254: U7.5@33.58,54.525 34.35,54.525 34.625,54.8 34.625,56 34.925,56.3 C34.2@35.637,56.3 R37.2@37.35,56.3
NetC35_2: C35.2 R39.2 U8.5 | length 5.2
  Top Layer w0.254: U8.5@45.431,54.525 46.2,54.525 46.475,54.8 46.475,56 46.775,56.3 C35.2@47.488,56.3 R39.2@49.2,56.3
NetC42_2: C42.2 R148.2 U7.24 | length 5
  Top Layer w0.254: R148.2@32.612,50.275 C42.2@30.912,50.275 30.9,50.287 30.925,50.312 30.925,50.801 31.074,50.95 32.625,50.95 32.887,51.212 U7.24@32.887,51.832
NetC43_2: C43.2 R150.2 U8.24 | length 5
  Top Layer w0.254: R150.2@44.463,50.275 C43.2@42.763,50.275 42.751,50.287 42.776,50.312 42.776,50.801 42.924,50.95 44.476,50.95 44.738,51.212 U8.24@44.738,51.832
NetC75_1: C75.1 C78.2 | length 1.4
  Top Layer w0.254: C78.2@35.382,27.317 C75.1@35.382,28.675
NetC75_2: C75.2 C76.2 L7.2 U12.20 U12.21 | length 9.3
  Top Layer w0.254: L7.2@33.401,28.917 33.574,29.09 33.764,29.09 34.219,29.545 34.717,29.545 35.087,29.915 35.087,29.934 35.378,30.225 C75.2@35.382,30.225 C76.2@37.236,30.225 37.275,30.187 37.944,30.187 38.446,29.685 38.783,29.685 ; 38.782,29.685 39.047,29.95 U12.20@40.278,29.95 ; 38.8,29.702 39.052,29.45 U12.21@40.278,29.45
NetC76_1: C76.1 C79.2 | length 1.4
  Top Layer w0.254: C79.2@37.211,27.317 37.224,27.33 37.224,28.662 C76.1@37.236,28.675
NetC77_1: C77.1 C80.2 | length 1.3
  Top Layer w0.254: C77.1@31.445,27.317 C80.2@31.445,28.612
NetC81_2: C81.2 U12.48 | length 2.9
  Top Layer w0.254: U12.48@53,25.728 53,24.562 53.052,24.511 v1(53.052,24.471)
  Bottom Layer w0.254: v1(53.052,24.471) 53.091,24.471 53.365,24.197 C81.2@54.578,24.197
NetC82_2: C82.2 U12.73 | length 2.7
  Top Layer w0.254: U12.73@55.722,38.45 C82.2@58.407,38.45
NetC85_1: C85.1 C87.2 | length 1.7
  Top Layer w0.381: C85.1@53.554,59.29 C87.2@53.554,60.947
NetC86_1: C86.1 C88.2 | length 1.7
  Top Layer w0.381: C88.2@53.554,52.877 C86.1@53.554,54.533
NetC89_2: C89.2 R68.2 U13.3 | length 5.1
  Top Layer w0.254: R68.2@57.215,49.685 C89.2@59.026,49.685 ; U13.3@58.547,52.556 58.547,49.834 58.877,49.834 C89.2@59.026,49.685 ; C89.2@59.041,49.67 C89.2@59.026,49.685
NetC90_2: C90.2 R69.2 U13.5 | length 6.2
  Top Layer w0.254: C90.2@57.219,60.947 57.464,60.702 57.635,60.702 58.264,60.072 59.827,60.072 U13.5@59.827,58.217 ; 59.827,60.036 60.44,60.649 60.476,60.649 60.774,60.947 R69.2@60.87,60.947
NetC93_1: C93.1 C95.2 | length 1.7
  Top Layer w0.381: C93.1@68.186,56.083 C95.2@68.186,57.74
NetC94_1: C94.1 C96.2 | length 1.7
  Top Layer w0.381: C96.2@68.186,49.67 C94.1@68.186,51.327
NetC97_2: C97.2 R74.2 U14.5 | length 4.7
  Top Layer w0.254: C97.2@60.87,49.67 62.015,49.67 ; U14.5@61.976,52.557 61.976,49.709 62.015,49.67 ; R74.2@62.687,49.67 62.015,49.67
NetC99_2: C99.2 R75.2 U14.3 | length 5.2
  Top Layer w0.254: U14.3@63.246,58.207 63.246,59.694 64.499,60.947 R75.2@64.534,60.947 ; R75.2@64.534,60.91 66.342,60.91 C99.2@66.379,60.947
NetC101_1: C101.1 C103.2 | length 1.7
  Bottom Layer w0.381: C101.1@68.186,59.305 C103.2@68.186,60.967
NetC102_1: C102.1 C104.2 | length 1.7
  Bottom Layer w0.381: C104.2@68.186,52.882 C102.1@68.186,54.543
NetC105_2: C105.2 R79.2 U15.5 | length 6.1
  Bottom Layer w0.254: R79.2@60.869,60.967 61.923,59.912 ; U15.5@61.923,58.353 61.923,59.912 ; C105.2@64.528,60.967 64.478,60.967 63.423,59.912 61.923,59.912
NetC107_2: C107.2 R81.2 U15.3 | length 4.8
  Bottom Layer w0.254: C107.2@62.715,49.67 62.747,49.703 63.19,49.703 ; U15.3@63.19,52.7 63.19,49.703 ; R81.2@64.534,49.67 64.502,49.703 63.19,49.703
NetC109_1: C109.1 C111.2 | length 1.7
  Bottom Layer w0.381: C109.1@53.554,56.093 C111.2@53.554,57.755
NetC110_1: C110.1 C112.2 | length 1.7
  Bottom Layer w0.381: C112.2@53.554,49.67 C110.1@53.554,51.332
NetC113_2: C113.2 R86.2 U16.3 | length 5
  Bottom Layer w0.254: C113.2@55.383,60.967 57.296,60.967 57.594,60.669 57.623,60.669 58.494,59.797 U16.3@58.494,58.353
NetC115_2: C115.2 R87.2 U16.5 | length 4.9
  Bottom Layer w0.254: R87.2@59.038,49.67 59.738,49.67 ; U16.5@59.764,52.703 59.764,49.696 59.738,49.67 ; C115.2@60.883,49.67 59.738,49.67
NetC117_1: C117.1 C119.2 | length 1.2
  Top Layer w0.254: C119.2@15.131,43.546 C117.1@15.131,44.743
NetC118_1: C118.1 C120.2 | length 1.2
  Top Layer w0.254: C120.2@15.131,36.852 C118.1@15.131,38.049
NetC123_1: C123.1 C124.1 D5.1 J10.2 L6.2 | length 1.2
  Top Layer w0.381: v1(10.576,35.58) 10.693,35.697 J10.2@11.033,35.697 ; J10.2@10.966,35.697 11.521,35.697 v1(11.61,35.607)
NetC125_2: C125.2 R103.1 U19.5 | length 9.6
  Mid-Layer 2 w0.254: v1(20.393,40.789) 20.781,40.789 21.285,40.284 v1(21.285,38.71)
  Bottom Layer w0.254: C125.2@16.076,43.607 16.743,43.607 19.369,40.981 19.616,40.981 R103.1@19.861,40.736 19.887,40.762 20.367,40.762 v1(20.393,40.789) ; U19.5@19.991,38.448 20.015,38.472 21.022,38.472 21.259,38.71 v1(21.285,38.71)
NetC126_1: C126.1 C129.2 | length 1.9
  Top Layer w0.254: C126.1@59.906,40.386 60.014,40.278 61.589,40.278 C129.2@61.697,40.17
NetC127_1: C127.1 C130.2 | length 1.8
  Bottom Layer w0.381: C127.1@45.202,34.413 C130.2@45.202,36.192
NetC136_1: C136.1 C144.2 | length 1.8
  Top Layer w0.254: C136.1@58.755,24.897 C144.2@60.534,24.897
NetC137_1: C137.1 C145.2 | length 1.8
  Bottom Layer w0.381: C137.1@45.182,37.946 C145.2@45.182,39.7
NetC138_1: C138.1 C146.2 | length 1.4
  Top Layer w0.381: C146.2@38.999,21.25 C138.1@40.448,21.25
NetC143_1: C143.1 C148.2 | length 1.2
  Top Layer w0.254: C148.2@15.194,30.159 C143.1@15.194,31.356
NetC155_1: C155.1 C156.2 | length 1.8
  Bottom Layer w0.381: C156.2@33.609,31.999 C155.1@35.361,31.999
NetD4_2: D4.2 L6.1 U19.7 U19.8
NetDS1_2: DS1.2 R5.1 | length 2
  Bottom Layer w0.254: R5.1@4.966,8.28 DS1.2@6.923,8.28
NetDS2_2: DS2.2 R10.1 | length 2
  Bottom Layer w0.254: R10.1@4.966,10.35 5.518,10.35 DS2.2@6.923,10.35
NetDS3_2: DS3.2 R16.1 | length 2
  Bottom Layer w0.254: R16.1@4.966,12.419 6.246,12.419 DS3.2@6.923,12.419
NetDS4_2: DS4.2 R20.1 | length 2
  Bottom Layer w0.254: R20.1@4.966,14.488 6.246,14.488 ; 6.246,14.488 DS4.2@6.923,14.488
NetDS5_2: DS5.2 R111.1 | length 2
  Bottom Layer w0.254: R111.1@4.966,18.627 DS5.2@6.923,18.627
NetDS6_2: DS6.2 R112.1 | length 2
  Bottom Layer w0.254: R112.1@4.966,16.557 6.246,16.557 DS6.2@6.923,16.557
NetJ1_14: J1.14 R54.2 | length 19.8
  Bottom Layer w0.254: R54.2@35.641,16.262 35.641,12.822 38.329,10.135 47.244,10.135 48.5,8.879 J1.14@48.5,7
NetJ1_15: J1.15 R52.2 | length 12.2
  Bottom Layer w0.254: R52.2@43.315,16.262 43.319,16.262 43.663,15.918 43.663,15.914 50.5,9.077 J1.15@50.5,7
NetJ1_16: J1.16 R50.2 | length 12.3
  Bottom Layer w0.254: R50.2@45.234,16.262 45.234,15.486 51.003,9.716 51.003,8.497 J1.16@52.5,7
NetJ1_17: J1.17 R48.2 | length 9.9
  Bottom Layer w0.254: R48.2@52.907,16.262 52.907,13.539 54.5,11.946 J1.17@54.5,7
NetJ1_18: J1.18 R45.2 | length 10.2
  Bottom Layer w0.254: J1.18@56.5,7 56.5,12.101 58.663,14.264 R45.2@58.663,16.262
NetJ1_35: J1.35 R55.1 | length 21.7
  Bottom Layer w0.254: R55.1@37.56,16.262 37.56,12.428 39.147,10.84 47.885,10.84 49.505,9.22 49.505,6.005 J1.35@48.5,5
NetJ1_36: J1.36 R53.1 | length 13.5
  Top Layer w0.254: J1.36@50.5,5 51.566,6.066 51.566,8.767 v1(51.583,8.784)
  Bottom Layer w0.254: R53.1@47.152,16.262 47.152,14.604 51.583,10.173 v1(51.583,8.784)
NetJ1_37: J1.37 R51.1 | length 13.5
  Bottom Layer w0.254: R51.1@49.071,16.262 49.071,13.663 53.492,9.241 53.492,5.992 J1.37@52.5,5
NetJ1_38: J1.38 R49.1 | length 12
  Bottom Layer w0.254: J1.38@54.5,5 55.499,5.999 55.499,12.866 54.826,13.539 R49.1@54.826,16.262
NetJ1_39: J1.39 R47.1 | length 13
  Bottom Layer w0.254: J1.39@56.5,5 57.506,6.006 57.506,11.709 60.581,14.784 R47.1@60.581,16.262
NetJ4_3: J4.3 R128.1 | length 7.2
  Top Layer w0.254: R128.1@70.135,30.908 70.181,30.955 70.792,30.955 71.463,31.626 71.463,35.763 72.2,36.5 J4.3@72.6,36.5
NetJ4_4: J4.4 R129.1 | length 5.9
  Top Layer w0.254: R129.1@70.135,33.093 70.135,33.096 70.479,33.441 70.483,33.441 70.948,33.906 70.948,35.888 71.408,36.348 71.408,36.958 72.2,37.75 J4.4@72.6,37.75
NetJ4_5: J4.5 R130.1 | length 5
  Top Layer w0.254: R130.1@70.135,35.277 70.353,35.495 70.353,35.864 71.004,36.516 71.004,37.763 71.039,37.798 71.039,37.839 72.2,39 J4.5@72.6,39
NetJ4_6: J4.6 R131.1 | length 4
  Top Layer w0.254: R131.1@70.135,37.461 70.135,37.511 71.153,38.53 71.153,39.203 72.2,40.25 J4.6@72.6,40.25
NetJ4_7: J4.7 R132.1 | length 3.6
  Top Layer w0.254: R132.1@70.135,39.645 70.135,39.709 71.082,40.656 71.082,41.14 71.442,41.5 J4.7@72.6,41.5
NetJ4_8: J4.8 R133.1 | length 2.8
  Top Layer w0.254: R133.1@70.135,41.83 70.135,41.833 70.479,42.178 70.483,42.178 71.055,42.75 J4.8@72.6,42.75
NetJ4_9: J4.9 R134.1 | length 2.5
  Top Layer w0.254: R134.1@70.135,44.014 72.586,44.014 J4.9@72.6,44
NetJ6_3: J6.3 R115.2 | length 3.2
  Top Layer w0.381: J6.3@11.532,23.932 11.765,23.698 12.328,23.698 13.438,22.588 14.197,22.588 R115.2@14.211,22.574
NetJ6_4: J6.4 R116.2 | length 3
  Top Layer w0.381: J6.4@11.532,21.392 11.618,21.305 12.623,21.305 13.402,20.526 R116.2@14.211,20.526
NetJ6_5: J6.5 R117.2 | length 2.8
  Top Layer w0.381: J6.5@11.532,18.852 11.718,18.665 14.024,18.665 R117.2@14.211,18.478
NetJ8_3: J8.3 R92.2 U17.6 | length 16.6
  Top Layer w0.254: J8.3@12.748,46.118 11.703,46.118 11.528,46.293 11.528,47.596 12.334,48.402 18.464,48.402 18.931,47.935 U17.6@18.931,46.852 18.931,45.423 19.323,45.031 20,45.031 21.613,43.417 R92.2@21.613,43.367
NetJ8_4: J8.4 R93.2 U17.7 | length 13.8
  Top Layer w0.254: J8.4@12.748,47.118 13.193,47.118 13.932,47.857 18.015,47.857 18.262,47.611 18.262,46.871 U17.7@18.281,46.852 18.281,45.11 19.024,44.366 19.586,44.366 20.097,43.856 20.097,43.009 21.265,41.841 21.269,41.841 21.613,41.496 R93.2@21.613,41.493
NetJ9_3: J9.3 R99.2 U18.6 | length 30.1
  Top Layer w0.254: J9.3@7.221,46.118 8.876,46.118 9.241,45.753 9.241,45.08 8.365,44.204 8.365,41.682 9.036,41.01 10.433,41.01 12.911,38.533 12.911,34.941 14.036,33.816 15.777,33.816 16.253,34.293 18.317,34.293 18.931,34.907 ; U18.6@18.931,36.3 18.931,34.853 20.46,33.323 20.46,31.449 21.613,30.296 R99.2@21.613,30.246
NetJ9_4: J9.4 R100.2 U18.7 | length 29.1
  Top Layer w0.254: J9.4@7.221,47.118 9.245,47.118 10.077,46.286 10.077,44.969 8.862,43.755 8.862,42.038 9.422,41.478 10.729,41.478 13.451,38.756 13.451,35.209 14.33,34.33 15.553,34.33 16.141,34.918 17.987,34.918 18.281,35.211 U18.7@18.281,36.3 18.299,36.318 18.299,37.279 18.448,37.428 20.105,37.428 21.613,35.919 R100.2@21.613,35.869
NetJ11_1: J11.1 R113.2 | length 2.8
  Top Layer w0.381: J11.1@11.532,16.053 11.909,16.43 R113.2@14.211,16.43
NetJ11_2: J11.2 R114.2 | length 3
  Top Layer w0.381: J11.2@11.532,13.513 11.609,13.59 12.632,13.59 13.424,14.383 R114.2@14.211,14.383
NetJ12_05: J12.05 R8.2 | length 7.4
  Top Layer w0.254: R8.2@70.175,13.513 71.583,13.513 73.252,15.182 75.077,15.182 76.27,16.375 J12.05@76.27,16.46
NetJ12_06: J12.06 R120.1 R162.1 | length 6.7
  Top Layer w0.254: R120.1@70.175,15.697 72.967,15.697 J12.06@73.73,16.46
  Bottom Layer w0.254: R162.1@70.977,16.71 71.102,16.585 73.605,16.585 J12.06@73.73,16.46
NetJ12_07: J12.07 R121.2 | length 9.2
  Top Layer w0.254: R121.2@70.159,22.171 71.594,22.171 72.269,22.846 74.391,22.846 75.032,22.206 75.032,20.134 76.165,19 J12.07@76.294,19
NetJ12_08: J12.08 R122.1 R161.1 | length 6.8
  Top Layer w0.254: R122.1@70.175,17.882 72.612,17.882 J12.08@73.73,19
  Bottom Layer w0.254: R161.1@70.977,19 J12.08@73.73,19
NetJ12_09: J12.09 R123.2 | length 17.1
  Top Layer w0.254: R123.2@70.175,11.25 71.311,11.25 72.767,12.707 76.907,12.707 77.75,13.55 77.75,20.084 J12.09@76.294,21.54
NetJ12_10: J12.10 R124.1 | length 4.5
  Top Layer w0.254: R124.1@70.175,20.066 70.46,19.781 72.099,19.781 73.73,21.412 J12.10@73.73,21.54
NetJ12_11: J12.11 R125.2 | length 9.7
  Top Layer w0.254: R125.2@70.135,28.724 74.439,28.724 74.984,28.179 74.984,25.366 J12.11@76.27,24.08
NetJ12_12: J12.12 R126.1 | length 3.7
  Top Layer w0.254: R126.1@70.135,24.356 70.323,24.167 73.643,24.167 J12.12@73.73,24.08
NetJ12_14: J12.14 R127.1 | length 3.6
  Top Layer w0.254: R127.1@70.142,26.548 73.658,26.548 J12.14@73.73,26.62
NetJP3_1: JP3.1 R108.2 | length 3
  Top Layer w0.254: R108.2@15.761,24.622 15.792,24.653 18.54,24.653 JP3.1@18.7,24.492
NetJP3_2: JP3.2 R109.2 U21.3 | length 5
  Top Layer w0.254: R109.2@15.761,26.67 17.32,26.67 17.532,26.882 ; U21.3@17.532,27.659 17.532,26.882 ; JP3.2@18.7,25.508 18.7,26.506 18.536,26.67 17.743,26.67 17.532,26.882
NetL2_1: L2.1 U5.14
NetL3_1: L3.1 U6.14
NetL4_1: L4.1 U7.14
NetL5_1: L5.1 U8.14
NetQ1_1: Q1.1 R58.2 R62.2 | length 3.5
  Top Layer w0.381: Q1.1@41.508,75.682 41.521,75.669 43.08,75.669 R58.2@43.092,75.656 R62.2@43.092,77.556
NetQ2_1: Q2.1 R59.2 R63.2 | length 3.5
  Top Layer w0.381: Q2.1@41.508,72.126 41.521,72.113 43.08,72.113 R59.2@43.092,72.1 R63.2@43.092,74
NetQ3_1: Q3.1 R60.2 R64.2 | length 3.5
  Top Layer w0.381: Q3.1@41.508,68.57 41.521,68.557 43.08,68.557 R60.2@43.092,68.544 R64.2@43.092,70.444
NetQ4_1: Q4.1 R61.2 R65.2 | length 3.5
  Top Layer w0.381: Q4.1@41.508,65.014 41.521,65.001 43.08,65.001 R61.2@43.092,64.988 R65.2@43.092,66.888
NetR1_1: R1.1 R2.2 U1.1 | length 5.2
  Top Layer w0.254: U1.1@62.295,15.519 63.14,15.519 63.476,15.855 R1.1@63.476,17.859 R2.2@65.364,17.859
NetR1_2: R1.2 R6.1 U1.2 | length 4.5
  Top Layer w0.254: U1.2@61.647,15.917 61.647,15.994 61.649,15.996 61.649,17.799 R6.1@61.589,17.859 61.834,18.104 62.062,18.104 63.069,19.111 63.082,19.111 63.38,19.409 R1.2@63.476,19.409
NetR3_2: R3.2 R4.1 U1.4 | length 5.6
  Top Layer w0.254: R4.1@55.927,17.859 R3.2@57.814,17.859 57.864,17.859 60.199,15.524 60.543,15.524 U1.4@60.545,15.522
NetR7_1: R7.1 U1.9 | length 1.8
  Top Layer w0.254: R7.1@61.395,12.145 61.643,12.393 61.643,13.87 U1.9@61.645,13.872